# EAGLE board RgbLedPanel (EAGLE 7.2.0)
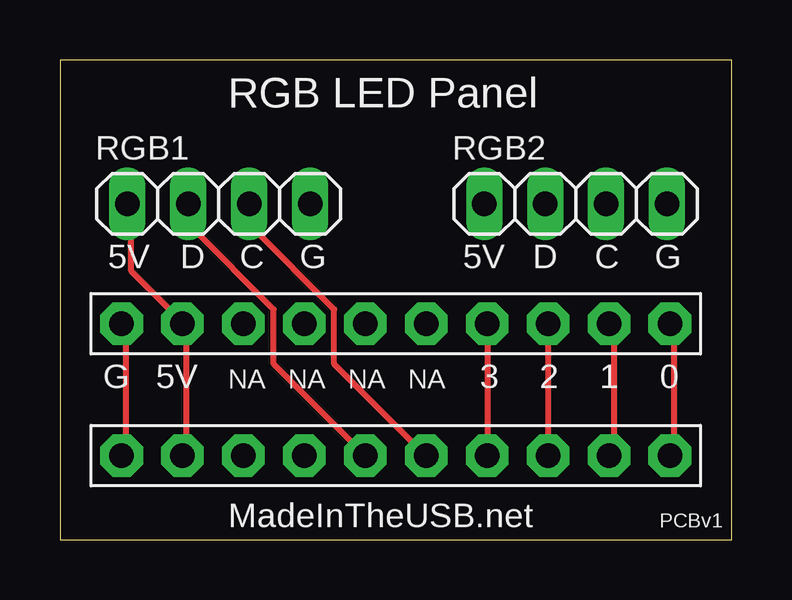
[diagram p0: board, top side]
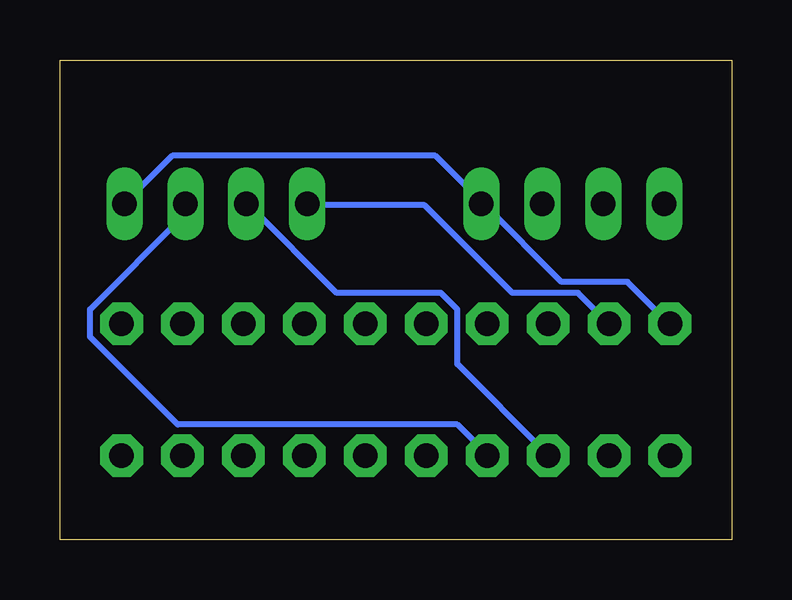
[diagram p1: board, bottom side, seen from below]

Size 28 x 20 mm. Coordinates in mm from the lower left corner, seen from the top.
Outline: 0,0 28,0 28,20 0,20 0,0
Copper layers (1*16): Top 0.035mm / dielectric 1.5mm / Bottom 0.035mm
Design rules "default": minimum track width 10mil, minimum drill 24mil, track to track 8mil, track to pad 8mil, pad to pad 8mil, via to via 8mil, smd to smd 8mil, copper to edge 40mil, drill to drill 8mil, minimum pad ring 10mil, minimum via ring 8mil, stop-mask expansion 4mil, vias tented up to drill 0mil, thermal gap 10mil

## Footprints (pad centres in the part's own frame; a part is rotated, then mirrored left to right if it is on the bottom)
1X10-BIG = drill 1.016 pad 1.778 octagon: 1 -11.43,0; 2 -8.89,0; 3 -6.35,0; 4 -3.81,0; 5 -1.27,0; 6 1.27,0; 7 3.81,0; 8 6.35,0; 9 8.89,0; 10 11.43,0
1X04 = drill 1.016 long: 1 -3.81,0; 2 -1.27,0; 3 1.27,0; 4 3.81,0

## Placement (x,y rotation side)
NUSBIO_IN  PINHD-1X10  [1X10-BIG]  14,3.5 180 top
NUSBIO_OUT  PINHD-1X10  [1X10-BIG]  14,9 180 top
RGB1  [1X04]  6.62,14 0 top
RGB2  [1X04]  21.5,14 0 top

## Library data of the parts
NUSBIO_IN NUSBIO_OUT = adafruit
RGB1 RGB2 = pinhead

## Nets
GND: NUSBIO_IN.10 NUSBIO_OUT.10 RGB1.4 RGB2.4
N$1: NUSBIO_IN.9 NUSBIO_OUT.9 RGB1.1 RGB2.1
N$2: NUSBIO_IN.5 RGB1.3
N$3: NUSBIO_IN.1 NUSBIO_OUT.1
N$4: NUSBIO_IN.8 RGB2.2
N$5: NUSBIO_IN.7 RGB2.3
N$6: NUSBIO_IN.6 RGB1.2
N$7: NUSBIO_IN.2 NUSBIO_OUT.2
N$8: NUSBIO_IN.3 NUSBIO_OUT.3
N$9: NUSBIO_IN.4 NUSBIO_OUT.4

## Tracks (layer width: path | path; a pad name or v marks a point on that pad's centre or on a via)
GND
  Top 0.254: NUSBIO_IN.10 2.74,3.66 2.74,8.91 NUSBIO_OUT.10
  Bottom 0.254: NUSBIO_OUT.10 2.74,9.14 4.34,10.74 7.09,10.74 10.29,13.95 RGB1.4 10.52,14.17 12.34,16 23.32,16 25.15,14.17 RGB2.4
N$1
  Top 0.254: RGB1.1 2.97,13.95 2.97,11.2 5.03,9.14 NUSBIO_OUT.9 5.26,8.91 5.26,3.66 NUSBIO_IN.9
  Bottom 0.254: RGB2.1 17.6,13.95 12.8,13.95 9.14,10.29 6.4,10.29 5.26,9.14 NUSBIO_OUT.9
N$2
  Top 0.254: RGB1.3 8,13.95 8,13.03 11.43,9.6 11.43,7.32 15.09,3.66 NUSBIO_IN.5
N$3
  Top 0.254: NUSBIO_IN.1 25.6,3.66 25.6,8.91 NUSBIO_OUT.1
N$4
  Bottom 0.254: RGB2.2 20.12,13.95 16.46,10.29 12.12,10.29 11.43,9.6 11.43,7.32 7.77,3.66 NUSBIO_IN.8
N$5
  Bottom 0.254: RGB2.3 22.86,13.95 22.86,13.49 26.75,9.6 26.75,8.46 23.09,4.8 11.43,4.8 10.29,3.66 NUSBIO_IN.7
N$6
  Top 0.254: RGB1.2 5.49,13.95 5.49,13.03 8.91,9.6 8.91,7.32 12.57,3.66 NUSBIO_IN.6
N$7
  Top 0.254: NUSBIO_IN.2 23.09,3.66 23.09,8.91 NUSBIO_OUT.2
N$8
  Top 0.254: NUSBIO_IN.3 20.34,3.66 20.34,8.91 NUSBIO_OUT.3
N$9
  Top 0.254: NUSBIO_IN.4 17.83,3.66 17.83,8.91 NUSBIO_OUT.4

## Text on the board
tNames: RGB LED Panel | 5V | D | C | G | 5V | D | C | G | G | 5V | NA | NA | NA | NA | 3 | 2 | 1 | 0 | MadeInTheUSB.net | PCBv1